# EAGLE board CT_schematic (EAGLE 7.6.0)

Size 100 x 80 mm. Coordinates in mm from the lower left corner, seen from the top.
Outline: 0,0 100,0 100,80 0,80 0,0
Copper layers (1*16): Top 0.035mm / dielectric 1.5mm / Bottom 0.035mm
Design rules "default": minimum track width 10mil, minimum drill 24mil, track to track 8mil, track to pad 8mil, pad to pad 8mil, via to via 8mil, smd to smd 8mil, copper to edge 40mil, drill to drill 8mil, minimum pad ring 10mil, minimum via ring 8mil, stop-mask expansion 4mil, vias tented up to drill 0mil, thermal gap 10mil

## Footprints (pad centres in the part's own frame; a part is rotated, then mirrored left to right if it is on the bottom)
C0603 = smd 0.8 x 0.8: 1 -0.762,0; 2 0.762,0
C0402 = smd 0.5 x 0.5: 1 -0.508,0; 2 0.508,0
C1206 = smd 1.3 x 1.6: 1 -1.524,0; 2 1.524,0
C1210 = smd 1.2 x 2.5: 1 -1.524,0; 2 1.524,0
EXV-9H = smd 3.505 x 1.676: 1 -2.857,0; 2 2.857,0
L0603 = smd 0.8 x 0.8: 1 -0.762,0; 2 0.762,0
PJ-037B_PACKAGE = drill 3.7 square: 1 12,0 | drill 3.2 square: 2 6,0
R0603 = smd 0.8 x 0.8: 1 -0.762,0; 2 0.762,0
LQFP64 = smd 0.3 x 1.2: 1 -3.75,-5.75; 2 -3.25,-5.75; 3 -2.75,-5.75; 4 -2.25,-5.75; 5 -1.75,-5.75; 6 -1.25,-5.75; 7 -0.75,-5.75; 8 -0.25,-5.75; 9 0.25,-5.75; 10 0.75,-5.75; 11 1.25,-5.75; 12 1.75,-5.75; 13 2.25,-5.75; 14 2.75,-5.75; 15 3.25,-5.75; 16 3.75,-5.75; 33 3.75,5.75; 34 3.25,5.75; 35 2.75,5.75; 36 2.25,5.75; 37 1.75,5.75; 38 1.25,5.75; 39 0.75,5.75; 40 0.25,5.75; 41 -0.25,5.75; 42 -0.75,5.75; 43 -1.25,5.75; 44 -1.75,5.75; 45 -2.25,5.75; 46 -2.75,5.75; 47 -3.25,5.75; 48 -3.75,5.75 | smd 1.2 x 0.3: 17 5.75,-3.75; 18 5.75,-3.25; 19 5.75,-2.75; 20 5.75,-2.25; 21 5.75,-1.75; 22 5.75,-1.25; 23 5.75,-0.75; 24 5.75,-0.25; 25 5.75,0.25; 26 5.75,0.75; 27 5.75,1.25; 28 5.75,1.75; 29 5.75,2.25; 30 5.75,2.75; 31 5.75,3.25; 32 5.75,3.75; 49 -5.75,3.75; 50 -5.75,3.25; 51 -5.75,2.75; 52 -5.75,2.25; 53 -5.75,1.75; 54 -5.75,1.25; 55 -5.75,0.75; 56 -5.75,0.25; 57 -5.75,-0.25; 58 -5.75,-0.75; 59 -5.75,-1.25; 60 -5.75,-1.75; 61 -5.75,-2.25; 62 -5.75,-2.75; 63 -5.75,-3.25; 64 -5.75,-3.75
SOIC-8 = smd 1.6 x 0.6: 1 -2.7,1.905 | smd 1.55 x 0.6: 2 -2.7,0.635; 3 -2.7,-0.635; 4 -2.7,-1.905; 5 2.7,-1.905; 6 2.7,-0.635; 7 2.7,0.635; 8 2.7,1.905
M10382 = smd 1 x 1: 1 0,0; 2 -1.6,0; 3 -3.2,0; 4 -3.2,-2; 5 -3.2,-3.6; 6 -3.2,-5.2; 7 -3.2,-6.8; 8 -3.2,-8.4; 9 -3.2,-10; 10 -3.2,-11.6; 11 -3.2,-13.2; 12 -3.2,-14.8; 13 -3.2,-16.4; 14 -3.2,-18; 15 -3.2,-19.6; 16 -3.2,-21.2; 17 -3.2,-22.8; 18 -0.55,-22.8; 19 1.05,-22.8; 20 2.65,-22.8; 21 5.3,-22.8; 22 5.3,-21.2; 23 5.3,-19.6; 24 5.3,-18; 25 5.3,-16.4; 26 5.3,-14.8; 27 5.3,-13.2; 28 5.3,-11.6; 29 5.3,-10; 30 5.3,-8.4; 31 5.3,-6.8; 32 5.3,-5.2; 33 5.3,-3.6; 34 5.3,-2; 35 5.3,0; 36 3.7,0
MBH7BLZ02-109004 = smd 0.5 x 0.5: 1 0,0; 15 9.85,0; 27 9.85,8.45; 41 0,8.45 | smd 0.45 x 0.5: 2 0.725,0; 3 1.425,0; 4 2.125,0; 5 2.825,0; 6 3.525,0; 7 4.225,0; 8 4.925,0; 9 5.625,0; 10 6.325,0; 11 7.025,0; 12 7.725,0; 13 8.425,0; 14 9.125,0 | smd 0.5 x 0.45: 16 9.85,0.725; 17 9.85,1.425; 18 9.85,2.125; 19 9.85,2.825; 20 9.85,3.525; 21 9.85,4.225; 22 9.85,4.925; 23 9.85,5.625; 24 9.85,6.325; 25 9.85,7.025; 26 9.85,7.725; 28 9.15,8.45; 29 8.45,8.45; 30 7.75,8.45; 31 7.05,8.45; 32 6.35,8.45; 33 5.65,8.45; 34 4.95,8.45; 35 4.25,8.45; 36 3.55,8.45; 37 2.85,8.45; 38 2.15,8.45; 39 1.45,8.45; 40 0.75,8.45; 42 0,7.75; 43 0,7.05; 44 0,6.35; 45 0,5.65; 46 0,4.95; 47 0,4.25; 48 0,3.55; 49 0,2.85; 50 0,2.15; 51 0,1.45; 52 0,0.75 | smd 3 x 2.5: 53 3.225,2.775; 54 6.625,2.775; 55 6.625,5.675; 56 3.225,5.675
SON-8 = smd 0.35 x 0.85: 1 -0.975,-1.475; 2 -0.325,-1.475; 3 0.325,-1.475; 4 0.975,-1.475; 5 0.975,1.475; 6 0.325,1.475; 7 -0.325,1.475; 8 -0.975,1.475 | smd 2.4 x 1.65: PAD 0,0
ABS07-32.768KHZ-7-T = smd 1.1 x 2.4: 1 -2.5,0; 2 0,0
ABLS-25.000MHZ-B2F-T = smd 5.6 x 2.8: 1 -3.81,0; 2 5.69,0
ASEK = smd 1.4 x 1: 1 -1.1,-0.8; 2 1.1,-0.8; 3 1.1,0.8; 4 -1.1,0.8
WSON-8 = smd 0.3 x 0.6: 1 -0.75,0; 2 0.05,0; 3 0.85,0; 4 1.65,0; 5 1.65,3.8; 6 0.85,3.8; 7 0.05,3.8; 8 -0.75,3.8 | smd 3 x 2.6: PAD 0.45,1.9
SON-6 = smd 0.55 x 0.3: 1 -0.355,0.5 | smd 0.52 x 0.3: 2 -0.37,0; 3 -0.37,-0.5; 4 0.37,-0.5; 5 0.37,0; 6 0.37,0.5
SW_4-1437565-2 = smd 1.4 x 2.1: 1 -2.23,4.55; 2 -2.23,-4.55; 3 2.23,4.55; 4 2.23,-4.55
LGM67K-G1J2-24-Z = smd 0.8 x 1.4: A -2,0; C 0,0
NC7SZ125M5X = smd 1.3 x 0.7: 1 -1.3,0.95; 2 -1.3,0; 3 -1.3,-0.95; 4 1.3,-0.95; 5 1.3,0.95

## Placement (x,y rotation side)
C1  1e-06  [C0603]  -53.34,64.77 0 top  (outside the outline)
C2  1e-07  [C0603]  -57.15,64.77 0 top  (outside the outline)
C3  1e-07  [C0603]  -60.96,64.77 0 top  (outside the outline)
C4  1e-07  [C0603]  -64.77,64.77 0 top  (outside the outline)
C5  1e-07  [C0603]  -68.58,64.77 0 top  (outside the outline)
C6  1e-07  [C0603]  -15.24,69.85 0 top  (outside the outline)
C7  4.7e-06  [C0603]  -49.53,64.77 0 top  (outside the outline)
C8  1e-08  [C0603]  -19.05,69.85 0 top  (outside the outline)
C9  1e-08  [C0603]  -22.86,69.85 0 top  (outside the outline)
C10  1e-06  [C0603]  -26.67,69.85 0 top  (outside the outline)
C11  1e-11  [C0402]  -22.86,74.93 0 top  (outside the outline)
C12  1e-11  [C0402]  -26.67,74.93 0 top  (outside the outline)
C13  1e-08  [C0402]  -30.48,74.93 0 top  (outside the outline)
C14  2.2e-11  [C0402]  -15.24,74.93 0 top  (outside the outline)
C15  2.2e-11  [C0402]  -19.05,74.93 0 top  (outside the outline)
C16  1e-07  [C0402]  -34.29,74.93 0 top  (outside the outline)
C17  1e-07  [C0402]  -38.1,74.93 0 top  (outside the outline)
C18  1e-07  [C0402]  -41.91,74.93 0 top  (outside the outline)
C19  1e-08  [C0402]  -45.72,74.93 0 top  (outside the outline)
C20  1e-08  [C0402]  -49.53,74.93 0 top  (outside the outline)
C21  1e-05  [C1206]  -39.37,57.15 0 top  (outside the outline)
C22  1e-05  [C1210]  -33.02,58.42 0 top  (outside the outline)
C23  1e-07  [C0402]  -53.34,74.93 0 top  (outside the outline)
C24  0.0001  [EXV-9H]  -58.42,41.91 0 top  (outside the outline)
C25  0.0001  [EXV-9H]  -17.78,50.8 0 top  (outside the outline)
C26  1e-08  [C0402]  -57.15,74.93 0 top  (outside the outline)
C27  1e-08  [C0402]  -60.96,74.93 0 top  (outside the outline)
F1  240.0  [L0603]  -30.48,69.85 0 top  (outside the outline)
J1  PJ-037B  [PJ-037B_PACKAGE]  -38.1,7.62 0 top  (outside the outline)
R2  1000.0  [R0603]  -34.29,69.85 0 top  (outside the outline)
R4  4700.0  [R0603]  -38.1,69.85 0 top  (outside the outline)
R5  4700.0  [R0603]  -41.91,69.85 0 top  (outside the outline)
R6  2200.0  [R0603]  -45.72,69.85 0 top  (outside the outline)
R7  2200.0  [R0603]  -49.53,69.85 0 top  (outside the outline)
R8  2200.0  [R0603]  -53.34,69.85 0 top  (outside the outline)
R9  2200.0  [R0603]  -57.15,69.85 0 top  (outside the outline)
R10  10000.0  [R0603]  -15.24,64.77 0 top  (outside the outline)
R11  10000.0  [R0603]  -20.32,64.77 0 top  (outside the outline)
R12  10000.0  [R0603]  -25.4,64.77 0 top  (outside the outline)
R13  10000.0  [R0603]  -30.48,64.77 0 top  (outside the outline)
R14  10000.0  [R0603]  -35.56,64.77 0 top  (outside the outline)
R15  100000.0  [R0603]  -57.15,57.15 0 top  (outside the outline)
R16  2231.0  [R0603]  -60.96,69.85 0 top  (outside the outline)
R17  1000.0  [R0603]  -64.77,69.85 0 top  (outside the outline)
R18  10000.0  [R0603]  -40.64,64.77 0 top  (outside the outline)
R19  10000.0  [R0603]  -45.72,64.77 0 top  (outside the outline)
R20  9100.0  [R0603]  -68.58,69.85 0 top  (outside the outline)
R21  680000.0  [R0603]  -62.23,57.15 0 top  (outside the outline)
R22  120000.0  [R0603]  -67.31,57.15 0 top  (outside the outline)
U1  STM32F102RBT6  [LQFP64]  -50.8,7.62 0 top  (outside the outline)
U2  AT25512N-SH-T  [SOIC-8]  -66.04,30.48 0 top  (outside the outline)
U3  M10382  [M10382]  -19.05,24.13 0 top  (outside the outline)
U4  MBH7BLZ02-109004  [MBH7BLZ02-109004]  -35.56,26.67 0 top  (outside the outline)
U5  PCF85063TP/1Z  [SON-8]  -27.94,57.15 0 top  (outside the outline)
U6  ABS07-32.768KHZ-7-T  [ABS07-32.768KHZ-7-T]  -59.69,50.8 0 top  (outside the outline)
U7  ABLS-25.000MHZ-B2F-T  [ABLS-25.000MHZ-B2F-T]  -36.83,50.8 0 top  (outside the outline)
U8  ASEK-32.768KHz-ECST  [ASEK]  -49.53,41.91 0 top  (outside the outline)
U9  LP3878SDX-ADJ/NOPB  [WSON-8]  -30.48,40.64 0 top  (outside the outline)
U10  TPS3895ADRYR  [SON-6]  -63.5,73.66 0 top  (outside the outline)
U11  4-1437565-2  [SW_4-1437565-2]  -52.07,31.75 0 top  (outside the outline)
U12  Q65110A2395  [LGM67K-G1J2-24-Z]  -17.78,58.42 0 top  (outside the outline)
U13  nc7sz125m5x  [NC7SZ125M5X]  -44.45,57.15 0 top  (outside the outline)
U14  nc7sz125m5x  [NC7SZ125M5X]  -50.8,57.15 0 top  (outside the outline)

## Library data of the parts
C1-C27 F1 J1 R2 R4-R22 U1-U14 = circuit_tree

## Nets
CLK_CRYSTAL_U1_5: C11.1 U1.5 U7.1
CLK_CRYSTAL_U1_6: C12.1 U1.6 U7.2
CLK_CRYSTAL_U5_1: U5.1 U6.1
CLK_CRYSTAL_U5_2: U5.2 U6.2
CLK_U1_3: U1.3 U8.3
GND: C1.2 C2.2 C3.2 C4.2 C5.2 C6.2 C7.2 C8.2 C9.2 C10.2 C11.2 C12.2 C13.2 C14.2 C15.2 C16.2 C17.2 C18.2 C19.2 C20.2 C21.2 C22.2 C23.2 C24.2 C25.2 C26.2 C27.2 J1.2 R2.2 R10.2 R17.2 R20.2 R22.2 U1.12 U1.18 U1.31 U1.47 U1.63 U2.4 U3.2 U3.4 U3.14 U3.17 U3.21 U3.24 U3.26 U3.28 U3.33 U3.34 U3.35 U3.36 U4.1 U4.3 U4.15 U4.27 U4.29 U4.41 U4.42 U4.43 U4.44 U4.45 U4.46 U4.47 U4.48 U4.49 U4.50 U4.52 U4.53 U4.54 U4.55 U4.56 U5.4 U5.PAD U8.2 U9.3 U9.PAD U10.2 U12.C U13.1 U13.3 U14.1 U14.3
NET_U1_7: R5.1 U1.7 U14.4
NET_U1_13: C8.1 C9.1 C10.1 F1.1 U1.13
NET_U1_29: R8.1 U1.29 U5.6
NET_U1_30: R9.1 U1.30 U5.5
NET_U1_58: R6.1 U1.58 U3.19
NET_U1_59: R7.1 U1.59 U3.18
NET_U1_60: R10.1 U1.60
NET_U1_61: U12.A
NET_U1_62: U11.3 U11.4
NET_U2_3: R11.1 U2.3
NET_U2_7: R13.1 U2.7
NET_U4_39: R4.1 U4.39 U13.4
NET_U5_3: R14.1 U5.3
NET_U9_1: C20.1 U9.1
NET_U9_6: R16.2 R17.1 U9.6
NET_U9_8: R15.1 U9.8
NET_U10_1: R19.1 R20.1 U10.1
NET_U10_3: R21.2 R22.1 U10.3
NET_U10_4: R18.1 U10.4 U13.2 U14.2
NET_U11_1: R2.1 U11.1 U11.2
PROC_SPI1_MISO: U1.22 U2.2
PROC_SPI1_MOSI: U1.23 U2.5
PROC_SPI1_NSS: R12.1 U1.20 U2.1
PROC_SPI1_SCK: U1.21 U2.6
PROC_USART1_CTS: U1.44 U4.26
PROC_USART1_RTS: U1.45 U4.24
PROC_USART1_RX: U1.43 U4.25
PROC_USART1_TX: U1.42 U4.23
VCC_S1_9V8: C21.1 C24.1 C25.1 J1.1 R15.2 U9.4
VCC_TIER1_3V3: C1.1 C2.1 C3.1 C4.1 C5.1 C6.1 C7.1 C13.1 C14.1 C15.1 C16.1 C17.1 C18.1 C19.1 C22.1 C23.1 C26.1 C27.1 F1.2 R4.2 R5.2 R6.2 R7.2 R8.2 R9.2 R11.2 R12.2 R13.2 R14.2 R16.1 R18.2 R19.2 R21.1 U1.1 U1.19 U1.32 U1.48 U1.64 U2.8 U3.5 U3.25 U3.27 U4.28 U5.8 U8.4 U9.5 U10.6 U13.5 U14.5

## Tracks (layer width: path | path; a pad name or v marks a point on that pad's centre or on a via)
CLK_CRYSTAL_U1_5  (2 unrouted)
CLK_CRYSTAL_U1_6  (2 unrouted)
CLK_CRYSTAL_U5_1  (1 unrouted)
CLK_CRYSTAL_U5_2  (1 unrouted)
CLK_U1_3  (1 unrouted)
GND  (81 unrouted)
NET_U1_7  (2 unrouted)
NET_U1_13  (4 unrouted)
NET_U1_29  (2 unrouted)
NET_U1_30  (2 unrouted)
NET_U1_58  (2 unrouted)
NET_U1_59  (2 unrouted)
NET_U1_60  (1 unrouted)
NET_U1_62  (1 unrouted)
NET_U2_3  (1 unrouted)
NET_U2_7  (1 unrouted)
NET_U4_39  (2 unrouted)
NET_U5_3  (1 unrouted)
NET_U9_1  (1 unrouted)
NET_U9_6  (2 unrouted)
NET_U9_8  (1 unrouted)
NET_U10_1  (2 unrouted)
NET_U10_3  (2 unrouted)
NET_U10_4  (3 unrouted)
NET_U11_1  (2 unrouted)
PROC_SPI1_MISO  (1 unrouted)
PROC_SPI1_MOSI  (1 unrouted)
PROC_SPI1_NSS  (2 unrouted)
PROC_SPI1_SCK  (1 unrouted)
PROC_USART1_CTS  (1 unrouted)
PROC_USART1_RTS  (1 unrouted)
PROC_USART1_RX  (1 unrouted)
PROC_USART1_TX  (1 unrouted)
VCC_S1_9V8  (5 unrouted)
VCC_TIER1_3V3  (48 unrouted)